# Altium PCB PCB1.PcbDoc
Units mil, origin at the board's own origin, x right, y up, seen from the top; angles counter-clockwise.
Board outline 3120.71 x 2355.23 mil, 2 copper layers (Top Layer, Bottom Layer); 81 components, 83 nets, 277 pads, 87 vias.
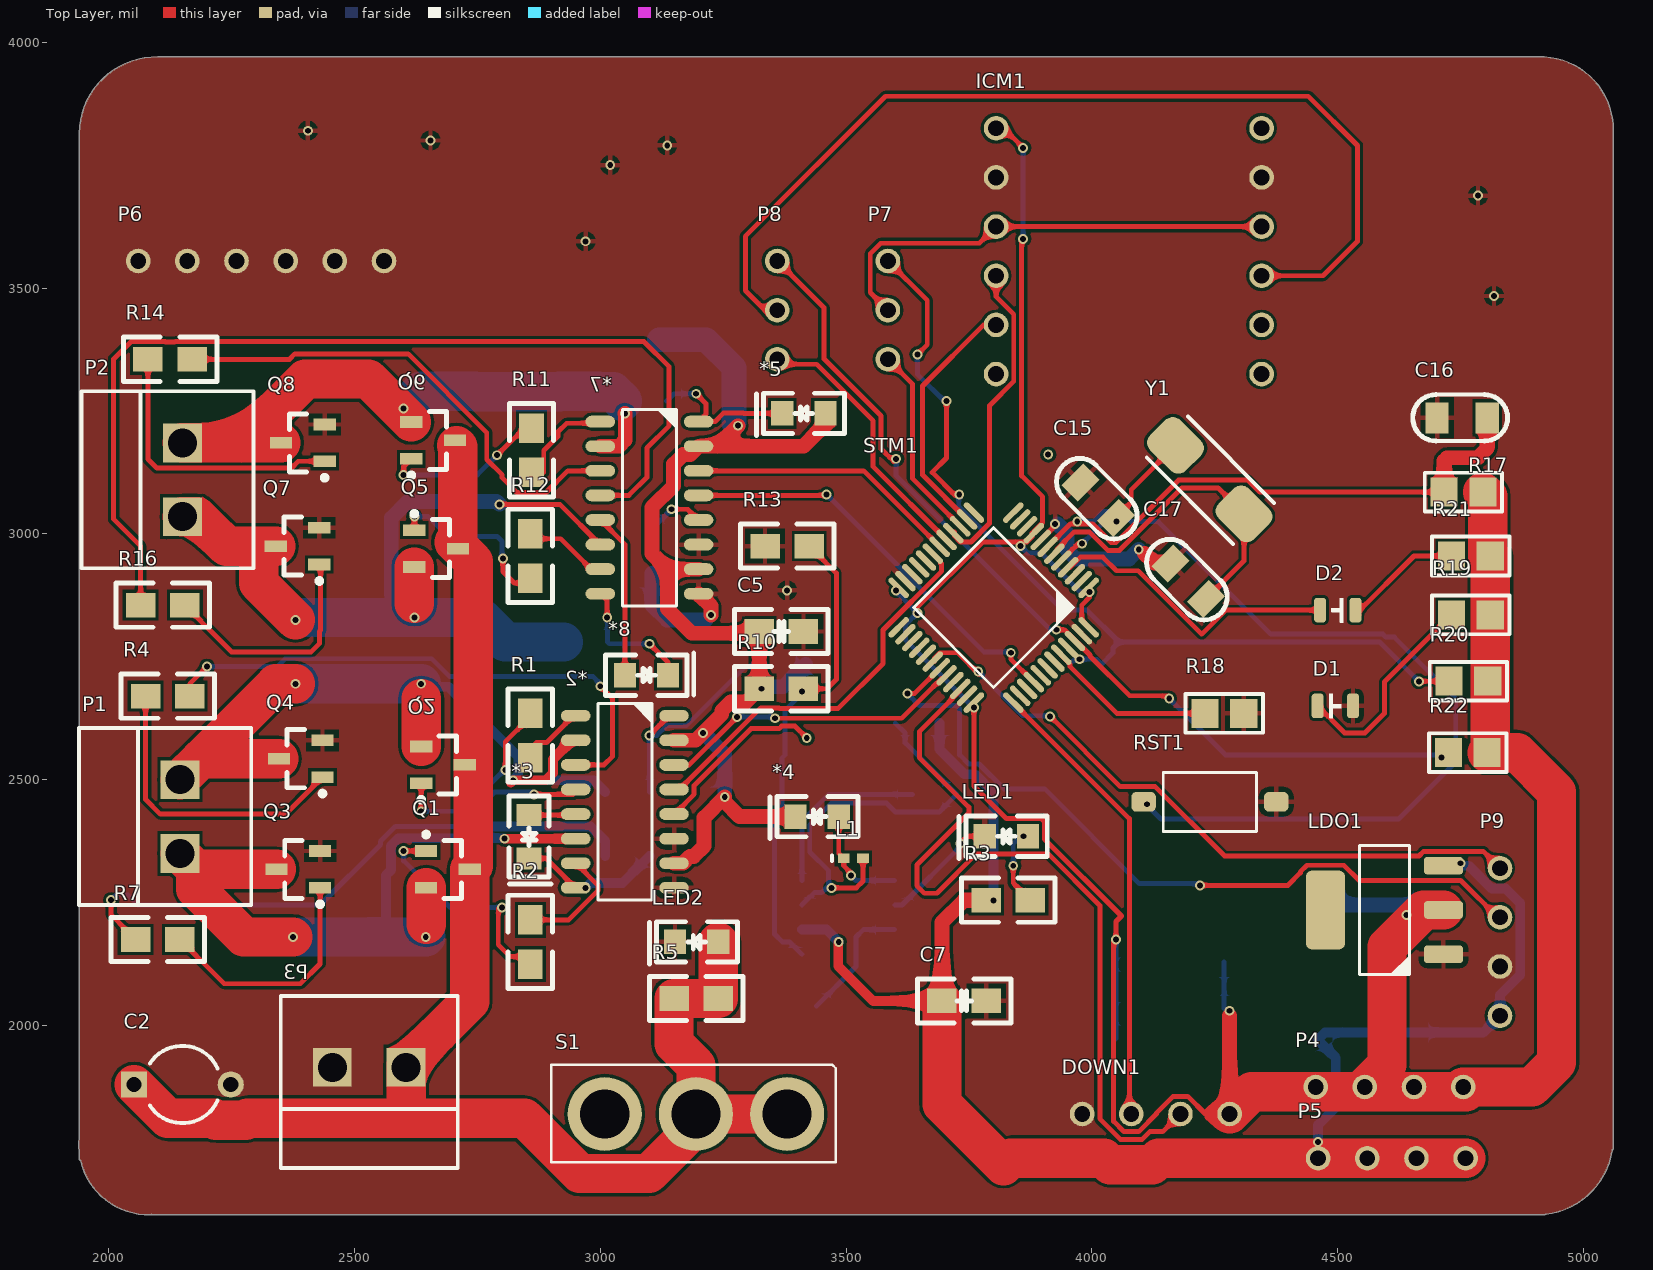
[diagram p0: Top Layer view]
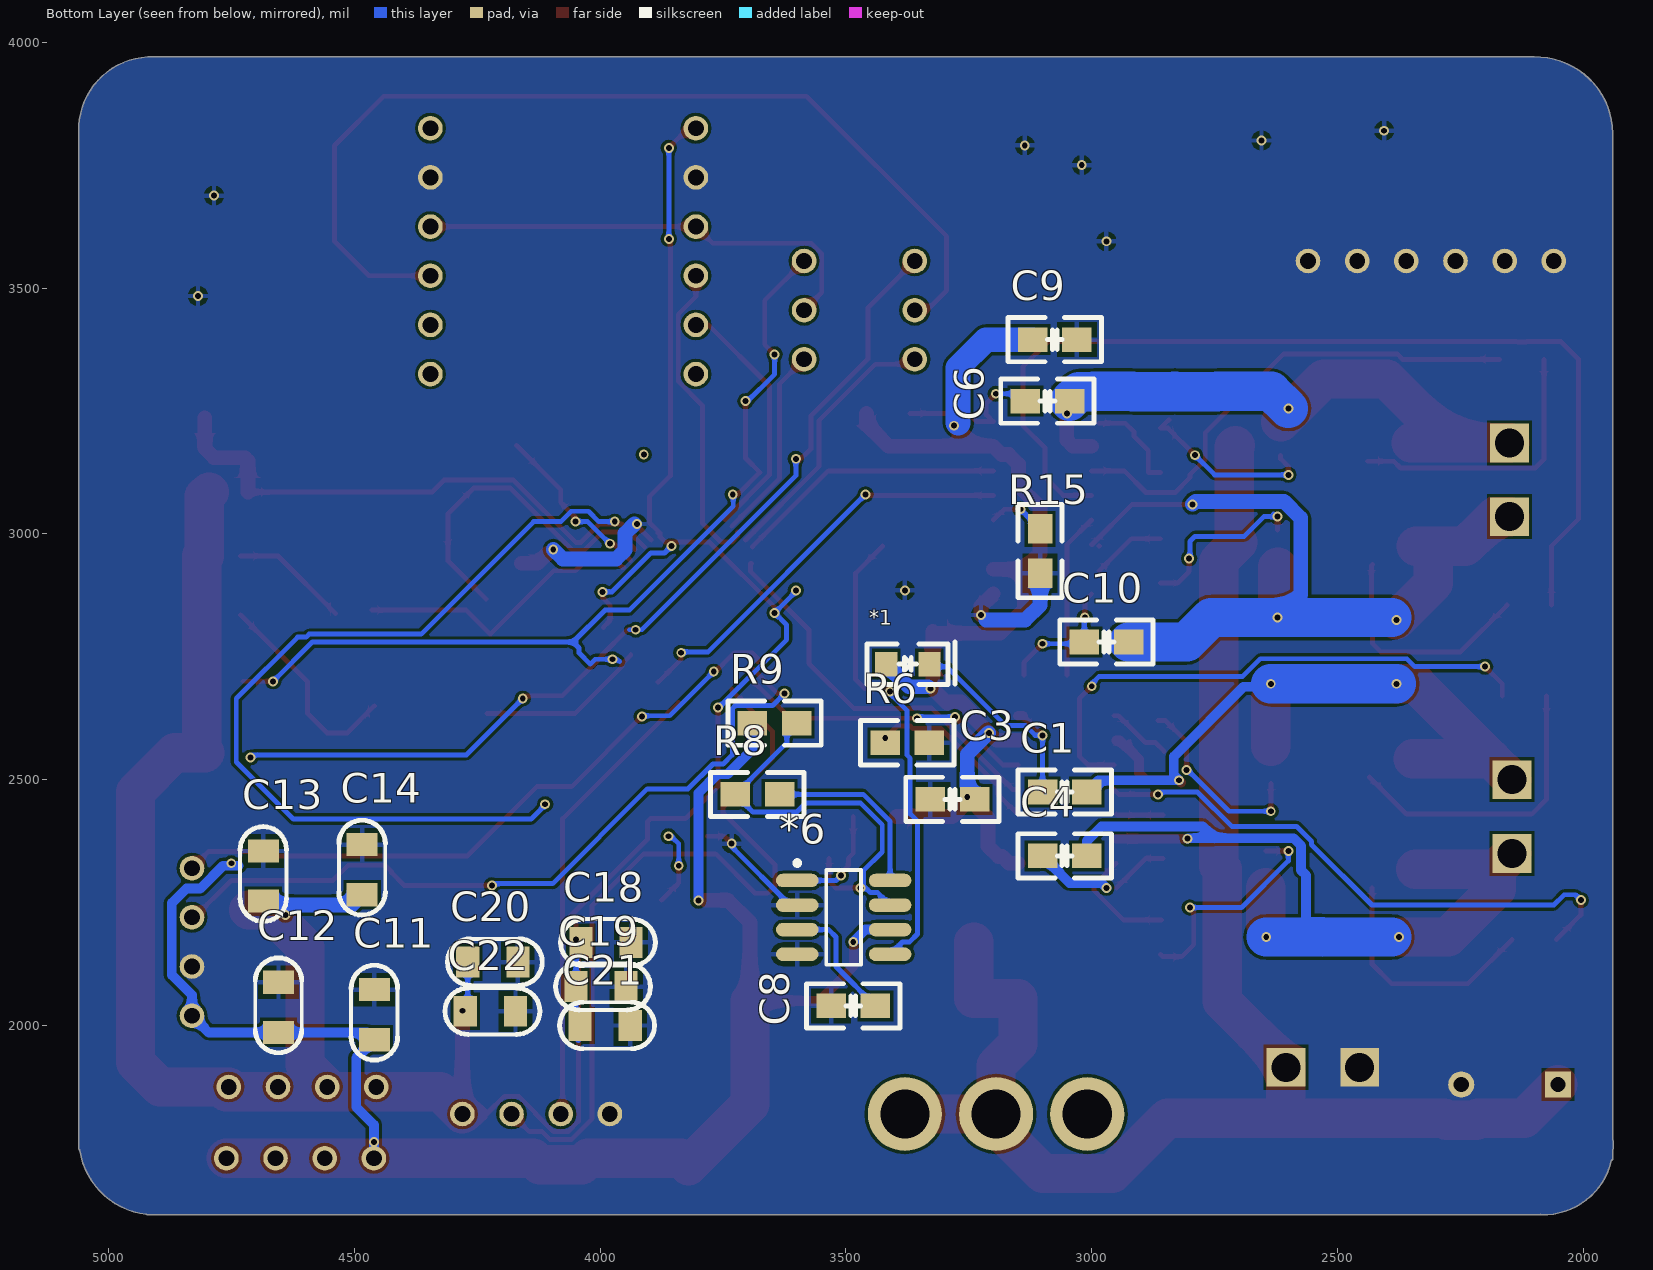
[diagram p1: Bottom Layer view, seen from below]

## Layer stack, top to bottom
Top Solder: solder mask 0.4, Solder Resist, Dk 3.5
Top Layer: signal copper 1.4
Dielectric 1: dielectric 12.6, FR-4, Dk 4.8
Bottom Layer: signal copper 1.4
Bottom Solder: solder mask 0.4, Solder Resist, Dk 3.5

## Board outline
1942.99,1725.4 ccw(c2081.67,1757.22) 2085.12,1614.99 ccw(c2085,1620) 2087.5,1615.65 ccw(c2090,1620) 2090,1614.98 4920,1614.98 ccw(c4920,1620) 4922.95,1615.94 ccw(c4905,1770) 5058.26,1746.19 ccw(c5055,1750) 5060.02,1750 5060.02,1764.92 ccw(c4905,1770) 5060.1,1770 ccw(c4905,1770) 5060.02,1775.08 5060.02,3830 ccw(c5055,3830) 5060.01,3830.26 ccw(c4912.5,3822.5) 4920.26,3970.01 ccw(c4912.5,3822.5) 4904.87,3970.01 2100.04,3970.01 cw(c2097.5,3812.5) 2100.08,3970.01 2100.04,3970.01 ccw(c2097.5,3812.5) 1939.99,3815.08 ccw(c1945,3815) 1940.65,3812.5 ccw(c1945,3810) 1939.98,3810 1939.99,1770.23 ccw(c2081.67,1757.22) 1939.99,1744.21 1939.99,1730 ccw(c1945,1730)

## Design rules (kind name [scope] priority, off if disabled: settings)
Clearance Clearance_5 [InNamedPolygon('Top Layer-No Net1')] p1: gap=6 ignorepadtopadclearanceinfootprint=FALSE except(0: Arc-Hole Track-Hole SMDPad-Hole THPad-Hole Via-Hole Fill-Hole Poly-Hole Region-Hole Text-Hole)
Clearance Clearance_4 [InNamedPolygon('Top Layer-No Net')] p2: gap=6 ignorepadtopadclearanceinfootprint=FALSE except(0: Arc-Hole Track-Hole SMDPad-Hole THPad-Hole Via-Hole Fill-Hole Poly-Hole Region-Hole Text-Hole)
Clearance Clearance_3 [InNamedPolygon('Top Layer-No Net')] p3: gap=6 ignorepadtopadclearanceinfootprint=FALSE except(0: Arc-Hole Track-Hole SMDPad-Hole THPad-Hole Via-Hole Fill-Hole Poly-Hole Region-Hole Text-Hole)
Clearance Clearance_2 [InNamedPolygon('Top Layer-No Net1')] p4: gap=6 ignorepadtopadclearanceinfootprint=FALSE except(0: Arc-Hole Track-Hole SMDPad-Hole THPad-Hole Via-Hole Fill-Hole Poly-Hole Region-Hole Text-Hole)
Clearance Clearance_1 [InNamedPolygon('Drill Drawing-No Net')] p5: gap=6 ignorepadtopadclearanceinfootprint=FALSE except(0: Arc-Hole Track-Hole SMDPad-Hole THPad-Hole Via-Hole Fill-Hole Poly-Hole Region-Hole Text-Hole)
Clearance [All] p6: gap=6 ignorepadtopadclearanceinfootprint=FALSE except(0: Arc-Hole Track-Hole SMDPad-Hole THPad-Hole Via-Hole Fill-Hole Poly-Hole Region-Hole Text-Hole)
PlaneClearance [All] p1: clearance=10
PlaneConnect [All] p1: planeconnectstyle=Direct reliefexpansion=20 reliefentries=4 reliefconductorwidth=10 reliefairgap=10
PolygonConnect PolygonConnect_7 [All vs IsNamedPolygon('Top Layer-No Net')] p1: thpad.connectstyle=Direct thpad.reliefconductorwidth=10 thpad.reliefentries=4 thpad.polygonreliefangle="90 Angle" thpad.airgapwidth=10 smdpad.connectstyle=Relief smdpad.reliefconductorwidth=10 smdpad.reliefentries=4 smdpad.polygonreliefangle="90 Angle" smdpad.airgapwidth=10 via.connectstyle=Relief via.reliefconductorwidth=10 via.reliefentries=4 via.polygonreliefangle="90 Angle" via.airgapwidth=10
PolygonConnect PolygonConnect_6 [All vs IsNamedPolygon('Top Layer-No Net1')] p2: thpad.connectstyle=Direct thpad.reliefconductorwidth=10 thpad.reliefentries=4 thpad.polygonreliefangle="90 Angle" thpad.airgapwidth=10 smdpad.connectstyle=Relief smdpad.reliefconductorwidth=10 smdpad.reliefentries=4 smdpad.polygonreliefangle="90 Angle" smdpad.airgapwidth=10 via.connectstyle=Relief via.reliefconductorwidth=10 via.reliefentries=4 via.polygonreliefangle="90 Angle" via.airgapwidth=10
PolygonConnect PolygonConnect_5 [All vs IsNamedPolygon('Top Layer-No Net1')] p3: thpad.connectstyle=Direct thpad.reliefconductorwidth=10 thpad.reliefentries=4 thpad.polygonreliefangle="90 Angle" thpad.airgapwidth=10 smdpad.connectstyle=Relief smdpad.reliefconductorwidth=10 smdpad.reliefentries=4 smdpad.polygonreliefangle="90 Angle" smdpad.airgapwidth=10 via.connectstyle=Relief via.reliefconductorwidth=10 via.reliefentries=4 via.polygonreliefangle="90 Angle" via.airgapwidth=10
PolygonConnect PolygonConnect_4 [All vs IsNamedPolygon('Top Layer-No Net')] p4: thpad.connectstyle=Direct thpad.reliefconductorwidth=10 thpad.reliefentries=4 thpad.polygonreliefangle="90 Angle" thpad.airgapwidth=10 smdpad.connectstyle=Relief smdpad.reliefconductorwidth=10 smdpad.reliefentries=4 smdpad.polygonreliefangle="90 Angle" smdpad.airgapwidth=10 via.connectstyle=Relief via.reliefconductorwidth=10 via.reliefentries=4 via.polygonreliefangle="90 Angle" via.airgapwidth=10
PolygonConnect PolygonConnect_3 [All vs IsNamedPolygon('Top Layer-No Net1')] p5: thpad.connectstyle=Direct thpad.reliefconductorwidth=10 thpad.reliefentries=4 thpad.polygonreliefangle="90 Angle" thpad.airgapwidth=10 smdpad.connectstyle=Relief smdpad.reliefconductorwidth=10 smdpad.reliefentries=4 smdpad.polygonreliefangle="90 Angle" smdpad.airgapwidth=10 via.connectstyle=Relief via.reliefconductorwidth=10 via.reliefentries=4 via.polygonreliefangle="90 Angle" via.airgapwidth=10
PolygonConnect PolygonConnect_2 [All vs IsNamedPolygon('Top Layer-No Net')] p6: thpad.connectstyle=Direct thpad.reliefconductorwidth=10 thpad.reliefentries=4 thpad.polygonreliefangle="90 Angle" thpad.airgapwidth=10 smdpad.connectstyle=Relief smdpad.reliefconductorwidth=10 smdpad.reliefentries=4 smdpad.polygonreliefangle="90 Angle" smdpad.airgapwidth=10 via.connectstyle=Relief via.reliefconductorwidth=10 via.reliefentries=4 via.polygonreliefangle="90 Angle" via.airgapwidth=10
PolygonConnect PolygonConnect_1 [All vs IsNamedPolygon('Drill Drawing-No Net')] p7: thpad.connectstyle=Direct thpad.reliefconductorwidth=10 thpad.reliefentries=4 thpad.polygonreliefangle="90 Angle" thpad.airgapwidth=10 smdpad.connectstyle=NoConnect smdpad.reliefconductorwidth=10 smdpad.reliefentries=4 smdpad.polygonreliefangle="90 Angle" smdpad.airgapwidth=10 via.connectstyle=Relief via.reliefconductorwidth=10 via.reliefentries=4 via.polygonreliefangle="90 Angle" via.airgapwidth=10
PolygonConnect [All] p8: connectstyle=Direct reliefconductorwidth=10 reliefentries=4 polygonreliefangle="90 Angle" airgapwidth=10
RoutingVias [All] p1: holewidth=28 width=50 viastyle="Through Hole" minholewidth=28 minwidth=50 maxholewidth=28 maxwidth=50
SolderMaskExpansion [All] p1: expansion=4
Width [All] p1: maxlimit=100 minlimit=10 preferedwidth=10 minimp=50.000000 maximp=50.000000 favimp=50.000000
28 further rules are at their usual default settings.

## Components (designator, comment, footprint, x,y, rotation, side; value= is the part's Value field where it differs from the comment)
*1 "IN5819" 0805D 3418,2735 r180 bottom
*2 "HIP4082" SOP_E150_16 3050,2455 r180 top
*3 "IN5819" 0805D 2855,2428 r270 top
*4 "IN5819" 0805D 3485,2425 r180 top
*5 "IN5819" 0805D 3458,3245 r180 top
*6 "MC34063" SOIC8 3504.49,2220 r180 bottom
*7 "HIP4082" SOP_E150_16 3100,3053.23 r180 top
*8 "IN5819" 0805D 3050,2712.45 r0 top
C1 "Cap" 0805C 3010,2475 r0 bottom value=1uF
C2 "Cap2" CAPR5-4X5 2150,1880 r0 top value=100pF
C3 "Cap" 0805C 3328.2,2460 r180 bottom value=0.1uF
C4 "Cap" 0805C 3010,2345 r0 bottom value=0.1uF
C5 "Cap" 0805C 3413.23,2801.46 r180 top value=0.1uF
C6 "Cap" 0805C 3045,3270 r0 bottom value=0.1uF
C7 "Cap" 0805C 3785,2050 r180 top value=0.1uF
C8 "Cap" 0805C 3440,2040 r0 bottom value=0.1uF
C9 "Cap" 0805C 3030,3395 r0 bottom value=0.1uF
C10 "Cap" 0805C 2925,2780 r0 bottom value=0.1uF
C11 "CAP_0805" CAP_0805 4460,2025 r270 bottom value=10u
C12 "CAP_0805" CAP_0805 4655,2040 r270 bottom value=0.1u
C13 "CAP_0805" CAP_0805 4686,2307 r270 bottom value=10u
C14 "CAP_0805" CAP_0805 4485,2320 r270 bottom value=0.1u
C15 "Cap" CAP_0805 4010,3070 r315 top value=20PF
C16 "CAP_0805" CAP_0805 4750,3235 r0 top value=0.1u
C17 "Cap" CAP_0805 4193.23,2905.35 r315 top value=20PF
C18 "CAP_0805" CAP_0805 3985,2170 r0 bottom value=0.1u
C19 "CAP_0805" CAP_0805 3995,2080 r0 bottom value=0.1u
C20 "CAP_0805" CAP_0805 4215,2130 r0 bottom value=0.1u
C21 "CAP_0805" CAP_0805 3986.72,2001 r0 bottom value=0.1u
C22 "CAP_0805" CAP_0805 4220,2030 r0 bottom value=0.1u
D1 "LED_0805" LED_0805_RED 4495,2650 r0 top
D2 "LED_0805" LED_0805_RED 4500,2845 r180 top
DOWN1 "HDR1x4_2.54" HDR1x4_2.54_180 4280,1820 r270 top
ICM1 "ICM20600" ICM20600模块 4122.21,3624.15 r0 top
L1 "Inductor" 0402-A 3514.68,2340 r0 top value=10mH
LDO1 "LDO1117" SOT223-3 4595,2235 r90 top
LED1 "lED" 0805D 3870,2385 r180 top
LED2 "lED" 0805D 3240,2170 r180 top
P1 "Header 2" Green_2P#1 2240,2425 r270 top
P2 "Header 2" Green_2P#1 2245,3110 r270 top
P3 "Header 2" Green_2P#2 2530,2010 r180 top
P4 "HDR1x4_2.54" HDR1x4_2.54_180 4455,1875 r90 top
P5 "HDR1x4_2.54" HDR1x4_2.54_180 4460,1730 r90 top
P6 "HDR1x6_2.54" HDR1X6_2.54_180 2060,3555 r90 top
P7 "HDR1x3_2.54" HDR1X3_2.54_180 3585,3355 r180 top
P8 "HDR1x3_2.54" HDR1X3_2.54_180 3360,3355 r180 top
P9 "HDR1x4_2.54" HDR1x4_2.54_180 4830,2020 r180 top
Q1 "MOSFET N" NMOS_SOT23#1 2690,2317.6 r0 top
Q2 "MOSFET N" NMOS_SOT23#2 2680,2530 r0 top
Q3 "MOSFET N" NMOS_SOT23#1 2385.71,2317.6 r180 top
Q4 "MOSFET N" NMOS_SOT23#1 2390.71,2542.6 r180 top
Q5 "MOSFET N" NMOS_SOT23#1 2666.06,2970 r0 top
Q6 "MOSFET N" NMOS_SOT23#2 2660,3190 r0 top
Q7 "MOSFET N" NMOS_SOT23#1 2384.29,2975 r180 top
Q8 "MOSFET N" NMOS_SOT23#1 2395,3185 r180 top
R1 "Res1" 0805R 2857.6,2544.75 r90 top value=10
R2 "Res1" 0805R 2857.6,2125 r90 top value=1K
R3 "Res1" 0805R 3875,2255 r180 top value=1K
R4 "Res1" 0805R 2165,2670 r180 top value=1K
R5 "Res1" 0805R 3150,2055 r0 top value=1K
R6 "Res1" 0805R 3330,2575 r0 bottom value=10K
R7 "Res1" 0805R 2145,2175 r180 top value=1K
R8 "Res1" 0805R 3635,2470 r0 bottom value=1K
R9 "Res1" 0805R 3600,2615 r0 bottom value=1K
R10 "Res1" 0805R 3413.23,2685 r180 top value=1K
R11 "Res1" 0805R 2860,3125 r90 top value=1K
R12 "Res1" 0805R 2857.6,2910 r90 top value=1K
R13 "Res1" 0805R 3335,2975.21 r0 top value=1K
R14 "Res1" 0805R 2170,3355 r180 top value=1K
R15 "Res1" 0805R 3105,2920 r90 bottom value=1K
R16 "Res1" 0805R 2155,2855 r180 top value=1K
R17 "RES_0805" RES_0805 4756.34,3085.25 r0 top value=10K
R18 "RES_0805" RES_0805 4270,2635 r0 top value=10K
R19 "RES_0805" RES_0805 4770,2835 r180 top value=1K
R20 "RES_0805" RES_0805 4765,2700 r180 top value=4.7K
R21 "RES_0805" RES_0805 4770,2954.75 r180 top value=1K
R22 "RES_0805" RES_0805 4763.66,2554.75 r180 top value=4.7K
RST1 "ButtonTACT_3x6x2.5_180" ButtonTACT_3x6x2.5_180 4240,2455 r180 top
S1 "00-1SW-2" 单向大开关 3483,1962 r180 top
STM1 "STM32F103C" LQFP_P0.5_48 3800,2850 r225 top
Y1 "8M" Osc-6032 4239.6,3110.4 r315 top

## Footprints (in the part's own frame and the unit in brackets; to place one, negate y for a bottom-side part, rotate by r counter-clockwise, add the part's x,y. Pads: shape width x height; smd on the part's side, far side on the other; paste and mask are expansions set on the pad)
0402-A [mm] "Chip Inductor, Body 1.0x0.5mm, IPC High Density"
  rect 0.6x0.5 smd: 1(-0.5,0) 2(0.5,0)
  silkscreen extent -1.1,-0.15 -1.1,0.15, body extent -0.55,-0.3 0.55,0.3, height 0.55
0805C [mil]
  rect 60x50 smd: 1(0,0) 2(90,0)
  silkscreen extent -50,-45 140,45
0805D [mil]
  rect 45x50 smd: A(0,0) K(88,0)
  silkscreen extent -39,-41 140,45
0805R [mil]
  rect 60x50 smd: 1(0,0) 2(90,0)
  silkscreen extent -50,-45 140,45
ButtonTACT_3x6x2.5_180 [mil]
  rrect50% 50x40 smd: 1(-135,0) 2(135,0)
  silkscreen extent -95,-60 95,60, body extent -157,-71 157,71, height 94
CAP_0805 [mil]
  rect 47.24x62.99 smd: 1(-48,1) 2(54,1)
  silkscreen extent -98,-46 95,48, body extent -42,-25 36,24, height 39
CAPR5-4X5 [mm] "Capacitor; 2 Leads"
  rect 1.35x1.35 hole 0.8: 1(-2.5,0)
  round 1.35 hole 0.8: 2(2.5,0)
  silkscreen extent -1.69,-2 1.82,2
Green_2P#1 [mm]
  rect 2x2 hole 1.5: 1(-1.905,-2.413) 2(1.905,-2.413)
  silkscreen extent -4.57,-7.62 4.57,1.27
Green_2P#2 [mm]
  rect 2x2 hole 1.5: 1(-1.905,2.413) 2(1.905,2.413)
  silkscreen extent -4.57,-1.27 4.57,7.62
HDR1X3_2.54_180 [mil]
  round 50 hole 32: 1(0,0) 2(0,-100) 3(0,-200)
  body extent -49,-250 49,50, height 323
HDR1x4_2.54_180 [mil]
  round 50 hole 32: 1(0,0) 2(0,-100) 3(0,-200) 4(0,-300)
  body extent -49,-350 49,50, height 323
HDR1X6_2.54_180 [mil]
  round 50 hole 32: 1(0,0) 2(0,-100) 3(0,-200) 4(0,-300) 5(0,-400) 6(0,-500)
  body extent -49,-550 49,50, height 323
ICM20600模块 [mil]
  round 50 hole 32: 1(222.79,200.85) 2(222.79,100.85) 3(222.79,0.85) 4(222.79,-99.15) 5(222.79,-199.15) 6(222.79,-299.15) 7(-317.21,200.85) 8(-317.21,100.85) 9(-317.21,0.85) 10(-317.21,-99.15) 11(-317.21,-199.15) 12(-317.21,-299.15)
  body extent -366,-349 272,251, height 323
LED_0805_RED [mil]
  rrect50% 24x50 smd: 1(-36,0) 2(36,0)
  silkscreen extent -12,-24 12,24, body extent -40,-25 40,25, height 43
LQFP_P0.5_48 [mil]
  oval 54x12 smd: 1(-165,108.27) 2(-165,88.58) 3(-165,68.9) 4(-165,49.21) 5(-165,29.53) 6(-165,9.84) 7(-165,-9.84) 8(-165,-29.53) 9(-165,-49.21) 10(-165,-68.9) 11(-165,-88.58) 12(-165,-108.27) 25(165,-108.27) 26(165,-88.58) 27(165,-68.9) 28(165,-49.21) 29(165,-29.53) 30(165,-9.84) 31(165,9.84) 32(165,29.53) 33(165,49.21) 34(165,68.9) 35(165,88.58) 36(165,108.27)
  oval 12x54 smd: 13(-108.27,-165) 14(-88.58,-165) 15(-68.9,-165) 16(-49.21,-165) 17(-29.53,-165) 18(-9.84,-165) 19(9.84,-165) 20(29.53,-165) 21(49.21,-165) 22(68.9,-165) 23(88.58,-165) 24(108.27,-165) 37(108.27,165) 38(88.58,165) 39(68.9,165) 40(49.21,165) 41(29.53,165) 42(9.84,165) 43(-9.84,165) 44(-29.53,165) 45(-49.21,165) 46(-68.9,165) 47(-88.58,165) 48(-108.27,165)
  silkscreen extent -115,-115 115,115, body extent -177,-178 177,177, height 61
NMOS_SOT23#1 [mm]
  rect 1.15x0.6 smd: D(1.125,0) G(-1.125,0.95) S(-1.125,-0.95)
  silkscreen extent -1.25,-1.5 0.7,1.92, body extent -0.7,-1.5 0.7,1.5, height 1.14
NMOS_SOT23#2 [mm]
  rect 1.15x0.6 smd: D(1.125,0) G(-1.125,-0.95) S(-1.125,0.95)
  silkscreen extent -1.25,-1.92 0.7,1.5, body extent -0.7,-1.5 0.7,1.5, height 1.14
Osc-6032 [mm]
  rrect50% 2.6x2.2 smd: 1(2.5,0) 2(-2.5,0)
  silkscreen extent -3.1,-1.5 3.2,1.5
RES_0805 [mm]
  rect 1.4x1.5 smd: 1(-1.018,-0.006) 2(0.982,-0.006)
  silkscreen extent -2.02,-1.01 1.98,0.99, body extent -1.1,-0.64 0.9,0.62, height 0.6
SOIC8 [mm]
  oval 2.2x0.7 smd: 1(-2.4,1.905) 2(-2.4,0.635) 3(-2.4,-0.635) 4(-2.4,-1.905) 5(2.4,-1.905) 6(2.4,-0.635) 7(2.4,0.635) 8(2.4,1.905)
  silkscreen extent -2.53,-2.45 0.9,2.93
SOP_E150_16 [mil]
  oval 60x24 smd: 1(-100,-175) 2(-100,-125) 3(-100,-75) 4(-100,-25) 5(-100,25) 6(-100,75) 7(-100,125) 8(-100,175) 9(100,175) 10(100,125) 11(100,75) 12(100,25) 13(100,-25) 14(100,-75) 15(100,-125) 16(100,-175)
  silkscreen extent -55,-200 55,200, body extent -118,-197 118,197, height 69
SOT223-3 [mil]
  rrect40% 36x80 smd: 1(-90.16,-120) 2(0,-120) 3(90.16,-120)
  rrect30% 160x80 smd: 4(0,120)
  silkscreen extent -131,-51 131,51, body extent -132,-144 132,144, height 71
单向大开关 [mil]
  oval 150.85x150 hole 100: COM(288.5,142) L(103,142) R(474,142)
  silkscreen extent 4,42 583,240

## Part data
C1 C2 C3 C4 C5 C6 C7 C8 C9 C10: "Capacitor", Publisher="Altium Limited"
  C1 C3 C4 C5 C6 C7 C8 C9 C10: LatestRevisionDate=17-Jul-2002, LatestRevisionNote="Re-released for DXP Platform.", PackageReference=RAD-0.3, Published=8-Jun-2000
  C2: PackageDescription="Capacitor; 2 Leads", PackageReference=CAPR5-4X5, Published=23-Sep-2002
C11 C12 C13 C14 C16 C18 C19 C20 C21 C22: library part Cap_0603, "Capacitor"
C15 C17: library part Cap_1, "Capacitor", LatestRevisionDate=17-Jul-2002, LatestRevisionNote="Re-released for DXP Platform.", PackageReference=RAD-0.3, Published=8-Jun-2000, Publisher="Altium Limited"
D1 D2: "LED"
DOWN1 P4 P5 P6 P7 P8 P9: "Header"
LDO1: "Power"
LED1 LED2: library part 00-D-LED, "LED"
P1 P2 P3: "Header, 2-Pin", LatestRevisionDate=17-Jul-2002, LatestRevisionNote="Re-released for DXP Platform.", Publisher="Altium Limited"
R1 R2 R3 R4 R5 R6 R7 R8 R9 R10 R11 R12 R13 R14 R15 R16 R17 R18 R19 R20 R21 R22: "Resistor"
  R1 R2 R3 R4 R5 R6 R7 R8 R9 R10 R11 R12 R13 R14 R15 R16: LatestRevisionDate=17-Jul-2002, LatestRevisionNote="Re-released for DXP Platform.", PackageReference=AXIAL-0.3, Published=8-Jun-2000, Publisher="Altium Limited"
RST1: "Button"
S1: library part 00-1SW-2_1
STM1: "MCU"
Y1: library part C-Osc, "Crystal Oscillator", LatestRevisionDate=17-Jul-2002, LatestRevisionNote="Re-released for DXP Platform.", PackageDescription="Crystal, Thru-Hole; 2 Leads; Body 3.1 x 8.2 mm (Dia.xH)", PackageReference=R38, Published=8-Jun-2000, Publisher="Altium Limited"
L1: Code_IEC=1005, Code_JEITA=0402, LatestRevisionDate=29-May-2009, LatestRevisionNote="IPC-7351 Footprint Added.", PackageDescription="Chip Inductor", PackageReference=0402-A, Published=8-Jun-2000, Publisher="Altium Limited"

## Via types
v1: diameter 20, hole 12, Top Layer to Bottom Layer, 85 vias
v2: diameter 20/20 (per signal layer), hole 12, Top Layer to Bottom Layer, 2 vias

## Nets (pads, with @x,y where several pads share a name; then routed paths per layer and width w, separated by ;. In a path a pad name is that pad's centre, name@x,y a point inside that pad or via, vN(x,y) a via of type N, cw(c..) or ccw(c..) an arc to the next point about the centre after c; other vN are vias at no path point)
3V3: C13.2 C14.2 C18.2 C19.2 C20.2 C21.2 C22.2 DOWN1.1 ICM1.7 LDO1.2 P4.1 P4.2 P4.3 P4.4 R17.2 R19.1 R20.1 R21.1 R22.1 STM1.1 STM1.9 STM1.24 STM1.36 STM1.48 | length 6206.7
  Top Layer w10: 3644,2850 3777.54,2983.54 3867.74,2983.54 3878.08,2993.88 3878.08,3001.47 STM1.9 3881.87,3005.27 3899.8,3023.2 3899.8,3075.2 3857,3118 v1@3857,3602.04 ; v1(3760,2646.8) 3760,2486.63 3825.63,2421 3897.06,2421 3903.5,2414.56 3903.5,2379.13 4060,2222.63 4048.89,2211.52 v1(4048.89,2175) 4044,2170.11 4044,1805.09 4065.09,1784 4094.91,1784 4130.91,1820 4130.91,1821.82 4165.09,1856 4194.91,1856 4230.91,1820 DOWN1.1 ; ICM1.7 3820,3825 v1(3860,3785) ; STM1.48 3979.31,2823.8 3979.31,2855 3995,2870.69 v1(3995,2882)
  Top Layer w30: DOWN1.1 4280,2020
  Top Layer w80: DOWN1.1 4325,1865 P4.4@4760,1865 ; P4.2 4600,1920 4600,2160 4675,2235 LDO1.2 ; P4.4 4895,1875 4945,1925 4945,2475 4865,2555 R22.1 4810.08,2561.34 R19.1 R21.1 ; R17.2 4803.74,3076.26 4804.9,3076.26 R21.1@4804.9,2955
  Bottom Layer w10: v1@3605,2885 3605,2879.21 v1(3645,2839.21) 3620.4,2814.6 3620.4,2784.6 v1@3755,2650 ; v1(3855,2975) 3869,2961 3896.63,2961 3975.63,2882 v1@3985,2882 ; v1(3860,3600) v1(3860,3785) ; C21.2@4044,1969 4048.89,1973.89 v1(4048.89,2175) ; C20.2 4269,2034 C22.2
  Bottom Layer w30: C14.2 4505,2245 4677,2245 C13.2
  other v1: 4280,2030 4640,2225 3601.63,2885
5V: *6.6 C7.2 C11.2 C12.2 LDO1.3 P5.1 P5.2 P5.3 P5.4 P9.1 R3.2 R9.2 | length 3476
  Top Layer w20: v1@3483.84,2170 3483.84,2121.16 3555,2050 C7.2
  Top Layer w30: C7.2 3695,2210 3740,2255 R3.2
  Top Layer w80: C7.2 3695,1840 3820,1715 3835,1730 4024.34,1730 4037.34,1717 4122.66,1717 4135.66,1730 P5.1 P5.2 P5.3 P5.4
  Bottom Layer w20: *6.6 3460,2195 v1(3485,2170) ; R9.2 3690,2561.8 3740.8,2511 3761.63,2511 3800,2472.63 v1@3800,2260 ; P5.1 4460,1798 4496,1834 4496,1934 C11.2 4474,1986 C12.2 4796,1986 P9.1 4830,2062.02 4871,2103.02 4871,2249 4841,2279 4813.02,2279 4767.02,2325 4735,2325
  other v1: 4460,1762.81 3800,2254 4750,2330
7.2V: C2.1 LED2.A P3.1 Q1.D Q2.D Q5.D Q6.D R5.1 R5.2 S1.COM S1.L | length 3330
  Top Layer w80: C2.1 2120.11,1811.47 2214.32,1811.47 2218.36,1807.42 2278.49,1807.42 2282.53,1811.47 2600,1811.47 ; 2702.32,2983.25 Q5.D@2710.36,2975.21 ; Q6.D@2707.6,3179.65 2710.36,3176.89 Q5.D@2710.36,2975.21 ; S1.COM@3175.21,1775.21 3099,1699 2958.46,1699 2845.99,1811.47 2600,1811.47 ; LED2.A R5.2 R5.1 3150,1963 3194.5,1918.5 S1.COM S1.L ; 2600,1811.47 2605,1816.47 P3.1 2605,1920 2734.29,2049.29 Q1.D 2741.89,2325.2 2741.89,2943.67 Q5.D@2710.36,2975.21
12v: *1.A *2.2 *2.7 *4.K *5.A *7.2 *7.7 C3.2 C5.2 C9.2 R10.2 | length 2261.6
  Top Layer w30: *2.7 3168.23,2330 3182.23,2344 3189.91,2344 3211,2365.09 3211,2423 3253,2465 3253,2455.2 3283.2,2425 *4.K ; *2.2 3193.83,2580 3247.2,2633.37 3247.2,2640.44 3265.36,2658.6 3291.04,2658.6 3293.93,2655.7 R10.2 C5.2 3319.7,2797.93 3186.07,2797.93 3136.48,2847.52 3136.48,2928.23 ; *7.7 3136.48,2928.23 ; v1(3280,3220) 3238.23,3178.23 ; *5.A 3458,3223 3413.23,3178.23 3238.23,3178.23 ; 3136.48,2928.23 3105,2959.71 3105,3053.84 3149,3097.84 3149,3141.9 3168.33,3161.23 3183,3161.23 *7.2 3238.23,3178.23
  Bottom Layer w30: v1@3210,2595 3253.2,2551.8 v1(3253.2,2465) ; v1@3332.84,2689 3372,2689 *1.A
  Bottom Layer w50: C9.2 3215,3395 3272,3338 3272,3225.98 3271.02,3225
  other v1: 3209.2,2595 3328.2,2685
ADC: STM1.13
BOOT0: R18.1 STM1.44 | length 345.6
  Top Layer w10: STM1.44 3937.55,2752.75 3955.48,2734.82 3955.48,2729.82 4050.55,2634.75 R18.1
CAN_TX: STM1.33
GND: *2.6 *2.8 *6.2 *6.4 *7.6 *7.8 C2.2 C3.1 C5.1 C7.1 C8.2 C9.1 C11.1 C12.1 C13.1 C14.1 C15.1 C16.1 C17.1 C18.1 C19.1 C20.1 C21.1 C22.1 D1.2 DOWN1.4 ICM1.2 ICM1.8 LDO1.1 LED1.K LED2.K P3.2 P6.1 P6.2 P6.3 P6.4 P6.5 P6.6 P9.2 Q3.S Q4.S Q7.S Q8.S R6.1 R13.1 R15.1 R18.2 RST1.1 STM1.8 STM1.23 STM1.35 STM1.47 | length 829
  Top Layer w10: P3.2 P3.2@2470,1915 ; v1(3732.26,2370) 3747.26,2385 LED1.K ; STM1.8 3925.14,3016.9 v1(3925.14,3020)
  Top Layer w30: *7.8 3225.14,2853.09 v1(3225.14,2835) ; 4107,2960 4127,2940 C17.1
  Bottom Layer w10: *6.2 3613.55,2245 3732.26,2363.71 v1(3732.26,2370)
  Bottom Layer w30: R15.1 3105,2855 3135,2825 3215,2825 ; v1@3930,3020 3949,3001 3949,2967.16 3967.16,2949 4075.91,2949 v1(4095.14,2968.23)
  other v1: 3380,2885 4817.71,3483.73 2970,3595 4785.14,3687.92 3020.21,3750 3136.12,3790 2654.58,3800 2405.14,3820
I2C1_SCL: P7.3 R20.2 STM1.45 | length 1870.2
  Top Layer w10: P7.3 3665,3475 3665,3385 v1(3645,3365) ; v1(3704.21,3270) 3704.21,3154.21 3675,3125 v1@3722.5,3077.5 ; v1@4666.25,2700.25 R20.2
  Bottom Layer w10: v1(3645,3365) 3645,3325 v1@3702.1,3267.9 ; v1(3730,3080.23) 3729,3079.23 3729,3056.3 3940.3,2845 3990,2845 4055,2780 ; 3960,2740 3965,2745 v1(3975,2745) 4010,2745 4020,2735 4042.81,2757.81 4042.81,2767.81 4055,2780 ; v1(4665,2700) 4585,2780 4055,2780
I2C1_SDA: P8.3 R22.2 STM1.46 | length 1887.1
  Top Layer w10: P8.3 3455,3460 3455,3356 3571,3240 3571,3173 v1@3596.51,3147.49 ; v1(3927.5,2805) 3944.7,2805 3996,2753.7 3996,2751.44 4076.75,2670.69 v1@4155,2670.69
  Bottom Layer w10: v1(3601.63,3152.6) 3601.63,3118.37 3915,2805 v1(3927.5,2805) 3940,2805 ; v1(4157.15,2665) 4271.65,2550.5 v1@4704.5,2550.5
  other v1: 4711,2545
ICM_SCK: ICM1.3 ICM1.9 P7.2 | length 948.6
  Top Layer w10: P7.2 3549,3491 3549,3569.91 3570.09,3591 3771,3591 ICM1.9 ICM1.3
ICM_SDATA: ICM1.4 P8.2 | length 2015
  Top Layer w10: P8.2 3335,3455 3295,3495 3295,3605 3580,3890 4440,3890 4540,3790 4540,3595 4470,3525 ICM1.4
KEY1: STM1.2
KEY2: STM1.3
LED: D2.2 STM1.4 | length 606.5
  Top Layer w10: STM1.4 3955.27,2931.87 3976.19,2952.79 4022.21,2952.79 4050,2925 4094.05,2925 4223.09,2795.96 4272.12,2845 D2.2
LED_PWM: STM1.42
MOTO+: *2.15 C1.1 P1.1 Q2.S Q4.D | length 1520.7
  Top Layer w20: v1@2817.77,2494 v1(2822.52,2498.75) 2889.23,2498.75 2904,2513.53 2904,2541.6 2942.4,2580 *2.15
  Top Layer w80: P1.1 2187.6,2542.6 ; Q4.D 2187.6,2542.6 ; v1(2380,2695) 2340,2695 2187.6,2542.6 ; Q2.S 2635.71,2665
  Bottom Layer w20: v1(2635.71,2695) 2641.71,2689 2691,2689 2833,2547 2833,2509.23 v1(2822.52,2498.75) 2986.25,2498.75 C1.1
  Bottom Layer w80: v1(2380,2695) v1(2635.71,2695)
MOTO-: *2.11 C4.1 P1.2 Q1.S Q3.D | length 1716.4
  Top Layer w20: v1(2805,2380) *2.11
  Top Layer w80: P1.2 P1.2@2177.4,2317.6 ; Q3.D P1.2@2177.4,2317.6 ; v1(2375,2180) 2275,2180 2177.4,2277.6 P1.2@2177.4,2317.6 ; 2645.71,2205.71 Q1.S
  Bottom Layer w20: 2530,2180 2564,2214 2564,2305.77 2574,2315.77 2574,2365.77 2589.23,2381 2750,2381 ; v1(2805,2380) 2804,2381 2750,2381 ; C4.1 3010,2375 2980,2405 2774,2405 2750,2381
  Bottom Layer w80: 2390,2180 2530,2180 v1(2645,2180)
MOTOa+: *7.15 C6.1 P2.1 Q6.S Q8.D | length 1216.7
  Top Layer w30: *7.15 3038.23,3178.23 3051,3191 3051,3244 v1(3050,3245)
  Top Layer w80: P2.1 2270,3185 ; Q8.D 2270,3185 ; Q6.S 2528.11,3315 2400,3315 2270,3185
  Bottom Layer w80: v1(2600,3255) 2635,3290 2744.45,3290 2745.45,3289 2828.55,3289 2829.55,3290 2832.45,3290 2833.45,3289 2916.55,3289 2917.55,3290 2995.8,3290 2996.8,3289 3026,3289 C6.1
MOTOa-: *7.11 C10.1 P2.2 Q5.S Q7.D | length 1729.6
  Top Layer w10: v1(2795,3060) 2917.7,3060 2999.47,2978.23 *7.11 ; *7.11@2984.47,2975 *7.11@2985,2975
  Top Layer w80: P2.2 2180,3035 2240,2975 2290,2975 ; Q7.D 2290,2975 ; v1(2380,2825) 2305,2900 2305,2960 2290,2975 ; 2621.77,2858.23 Q5.S
  Bottom Layer w30: v1(2621.77,2830) 2575,2876.77 2575,3032.07 2608.93,3066 2789,3066 v1(2795,3060)
  Bottom Layer w80: 2390,2830 v1(2621.77,2830) 2757,2830 2807,2780 C10.1
Net*1_K: *1.K *2.1 C1.2 | length 474.6
  Top Layer w10: v1(3100,2590) *2.1@3140,2630
  Top Layer w20: *2.1@3140,2630 *2.1
  Bottom Layer w10: C1.2 v1(3100,2590) 3115,2590 3135,2610 3175,2610 3295,2730 *1.K@3330,2730
  Bottom Layer w20: *1.K@3330,2730 *1.K
Net*2_5: *2.5 R6.2 | length 364.4
  Top Layer w10: *2.5 3150.53,2430 3191,2470.47 3191,2488.08 3306.92,2604 3363.7,2604 3368.7,2609 3396,2609 v1(3420,2585)
Net*2_9: *2.9 *3.K C4.2 | length 276.8
  Top Layer w10: *3.K 2889.47,2340 2949.47,2280 *2.9
  Bottom Layer w20: v1(2970,2280) 2980,2290 3045,2290 C4.2
Net*2_10: *2.10 R2.2 | length 236.5
  Top Layer w10: R2.2 2935.53,2215 2995,2274.47 2995,2285.53 2950.53,2330 *2.10
Net*2_12: *2.12 *3.A | length 95.8
  Top Layer w10: *3.A 2948,2428 *2.12
Net*2_13: *2.13 R7.2 | length 1169.2
  Top Layer w10: v1(2005,2255) 2005,2225 R7.2 ; v1(2865,2470) 2945,2470 *2.13@2955,2480
  Bottom Layer w10: v1(2005,2255) 2016,2266 2039,2266 2060,2245 2430,2245 2553,2368 2553,2374.47 2583.53,2405 2715,2405 2785,2475 2860,2475 v1(2865,2470)
Net*2_14: *2.14 R4.1 | length 1132.4
  Top Layer w10: R4.1 2165,2695 v1(2200,2730) ; *2.14@2955,2530 3007.6,2530 3025,2547.4 3025,2665 v1(3000,2690)
  Bottom Layer w10: v1(2200,2730) 2342.88,2730 2358.88,2746 2656.83,2746 2692.83,2710 2985,2710 v1@3000,2695
Net*2_16: *2.16 R1.1 | length 132.4
  Top Layer w10: R1.1@2852.6,2557.6 2870.53,2575.53 2891.12,2575.53 2945.6,2630 *2.16 *2.16@2955,2630
Net*4_A: *4.A *6.1 L1.1 | length 218.5
  Top Layer w10: *4.A 3485,2350 L1.1 3495,2325 v1@3510,2310
  Bottom Layer w10: v1(3510,2305) 3520,2295 *6.1
Net*5_K: *5.K *7.1 C6.2 | length 315.3
  Top Layer w10: v1(3195,3285) 3215,3265 3215,3243.23 *7.1 3233.23,3228.23 3251,3246 3290.77,3246 3291.77,3245 *5.K
  Bottom Layer w10: C6.2 3150,3285 v1(3195,3285)
Net*6_3: *6.3 C8.1 | length 258.3
  Bottom Layer w10: C8.1 3520,2120 3520,2180 3535,2195 *6.3
Net*6_5: *6.5 R10.1 R13.2 | length 960.6
  Top Layer w10: R10.1 3461.16,2685 3480,2703.84 3480,2920.21 R13.2
  Bottom Layer w10: *6.5 3384.78,2170.22 3370.21,2170.22 3354.2,2186.23 3354.2,2415.44 3369.2,2430.44 3369.2,2543.64 3376,2550.44 3376,2641 v1@3415,2680
  other v1: 3410,2679
Net*6_7: *6.7 L1.2 R8.2 R9.1 | length 863.2
  Top Layer w10: v1(3470,2280) 3520.69,2280 3534.37,2293.68 L1.2
  Bottom Layer w10: *6.7 3435.22,2270.22 3449.79,2270.22 3464.31,2284.74 3464.31,2314.57 3426,2352.88 3426,2408.37 3470,2452.37 3582.07,2452.37 3600.44,2434 3689,2434 R8.2 3620,2575 3620,2595 R9.1
Net*6_8: *6.8 R8.1 | length 367.8
  Bottom Layer w10: *6.8 3410,2415 3465,2470 R8.1
Net*7_5: *7.5 R15.2 | length 120.6
  Top Layer w10: v1(3145,3050) 3178.23,3050 *7.5
  Bottom Layer w10: R15.2 v1(3145,3050)
Net*7_9: *7.9 *8.K C10.2 | length 270.2
  Top Layer w10: *7.9 3014,2864.23 v1(3014,2830) ; v2(3100,2776.42) 3138,2738.42 *8.K
  Bottom Layer w10: v1@3015,2830 C10.2 3018.58,2776.42 v2(3100,2776.42)
Net*7_10: *7.10 R12.2 | length 151.9
  Top Layer w10: R12.2@2860,2990 2919.47,2990 2984.47,2925 *7.10@2985,2925
Net*7_12: *7.12 *8.A | length 336.8
  Top Layer w10: *7.12 3000.53,3028.23 3050,2978.76 *8.A
Net*7_13: *7.13 R16.2 | length 2043.8
  Top Layer w10: R16.2 2065,2975 2010,3030 2010,3355.56 2045.44,3391 2114.56,3391 2115.56,3390 2134.44,3390 2135.44,3391 3089,3391 3140,3340 3140,3220 3095,3175 3095,3115 3058.23,3078.23 *7.13
Net*7_14: *7.14 R14.1 | length 1005.2
  Top Layer w10: R14.1 2367.88,3355 2378.88,3366 2609,3366 2769,3206 2769,3151.3 2800.3,3120 2800.3,3114.14 2830.44,3084 2889.56,3084 2933.79,3128.23 *7.14
Net*7_16: *7.16 R11.1 | length 197.8
  Top Layer w10: R11.1 2885,3125 2885,3169.44 2913.56,3198 2913.56,3207.17 2931.38,3225 *7.16@2985,3225
NetC15_2: C15.2 STM1.5 Y1.2 | length 327.5
  Top Layer w10: STM1.5 v1@3971.76,2980 ; C15.2 4080,3063.63 4080,3090 Y1.2
  Bottom Layer w10: v1(3980,2980) 4025,3025 v1@4042.81,3025
  other v1: 4050,3025
NetC17_2: C17.2 STM1.6 Y1.1 | length 690.1
  Top Layer w10: STM1.6@3928.69,2968.57 3964.12,3004 3994.69,3004 4032.14,2966.55 4055.95,2966.55 4183.05,3093.65 4256.35,3093.65 Y1.1 4309.19,2944.94 C17.2
NetD1_1: D1.1 R19.2 | length 432.1
  Top Layer w10: D1.1 4514,2595 4555,2595 4595,2635 4595,2698.91 R19.2
NetD2_1: D2.1 R21.2 | length 242.3
  Top Layer w10: D2.1@4537.62,2837.62 4655,2955 R21.2
NetLED1_A: LED1.A R3.1 | length 155.7
  Top Layer w10: v1@3840,2330 v1(3840,2325) 3840,2290 R3.1
  Bottom Layer w10: v1(3840,2325) 3840,2370 v1@3855,2385
  other v1: 3860.67,2385
NetQ1_G: Q1.G R2.1 | length 467.1
  Top Layer w10: v1(2600,2355) Q1.G ; v1(2800.3,2240) 2794.8,2240 2792.4,2237.6 2792.4,2164.6 2817,2140 2855,2140 R2.1@2860,2145
  Bottom Layer w10: v1(2600,2355) 2600,2335 2695,2240 v1(2800.3,2240)
NetQ2_G: Q2.G R1.2 | length 386.8
  Top Layer w10: v1(2635.71,2435.71) Q2.G ; v2(2807,2520) 2807,2577 2850,2620 R1.2@2865,2620
  Bottom Layer w10: v1(2635.71,2435.71) 2720.71,2435.71 v2@2800,2515
NetQ3_G: Q3.G R7.1 | length 494
  Top Layer w10: R7.1 2235,2085 2389.84,2085 2430,2125.16 Q3.G
NetQ4_G: Q4.G R4.2 | length 613.6
  Top Layer w10: R4.2 2075,2460 2105,2430 2359.8,2430 Q4.G
NetQ5_G: Q5.G R12.1 | length 368.1
  Top Layer w10: Q5.G v1@2621.77,3036.77 ; v1(2802,2950) 2802,2923 2825,2900 R12.1@2860,2900
  Bottom Layer w10: v1@2630,3040 2625,3035 v1(2621.77,3035) 2650,3035 2690,2995 2790,2995 2800,2985 v1@2800,2950
NetQ6_G: Q6.G R11.2 | length 369.6
  Top Layer w10: v1(2600,3120) 2600,3136.89 Q6.G Q6.G@2615.71,3159.88 ; v1(2790,3160) 2845,3215 R11.2 R11.2@2843.11,3231.89
  Bottom Layer w10: v1(2600,3120) 2750,3120 v1(2790,3160)
NetQ7_G: Q7.G R16.1 | length 482.9
  Top Layer w10: R16.1 2250,2760 2412.17,2760 2428.58,2776.42 2428.58,2801.46 2431,2803.88 2431,2935.18 Q7.G
NetQ8_G: Q8.G R14.2 | length 575.4
  Top Layer w10: R14.2 2080,3151.89 2097.89,3134 2371.83,3134 2385.43,3147.6 Q8.G
NSS: ICM1.11 STM1.14 | length 510.1
  Top Layer w10: STM1.14 3655.27,3120 3655.27,3300.66 3779.61,3425 ICM1.11
PA0: STM1.10
PA1: STM1.11
PA2: STM1.12
PA8: STM1.29
PB2: STM1.20
PB10: STM1.21
PB11: STM1.22
PWM_INPUT: 
RELAY_PWM: STM1.43
RST: C16.2 R17.1 RST1.2 STM1.7 | length 2877.1
  Top Layer w10: STM1.7 3956.08,3020 4001.32,3020 4038.77,2982.55 4049.32,2982.55 4176.42,3109.65 4317.15,3109.65 4341.8,3085 R17.1
  Top Layer w30: R17.1 4716.26,3148.86 4722.4,3155 4785,3155 4804,3174 C16.2
  Bottom Layer w10: v1(3970,3025) 4002.37,3025 4023.37,3046 4058.7,3046 4079.7,3025 4135,3025 4364,2796 4591.63,2796 4597.63,2790 4615,2790 4740,2665 4740,2536 4624,2420 4140,2420 v1@4115,2445
  other v1: 4111.65,2450
SPI1_MISO: ICM1.10 STM1.16 | length 641.7
  Top Layer w10: STM1.16 3720.02,3003.37 3720.02,2995.78 3732.26,2983.54 3753.94,2983.54 3791.73,3021.34 3791.73,3260.82 3841,3310.09 3841,3446.57 3805,3482.57 ICM1.10
SPI1_MOSI: P8.1 STM1.17 | length 551
  Top Layer w10: P8.1 3370,3345 3440,3345 3555,3230 3555,3136.76 STM1.17
SPI1_SCK: P7.1 STM1.15 | length 400.5
  Top Layer w10: P7.1 3634.61,3305.39 3634.61,3112.83 STM1.15
SPI2_MISO: STM1.27
SPI2_MOSI: STM1.28
SPI2_NSS: STM1.25
SPI2_SCK: STM1.26
SWCLK: DOWN1.3 STM1.37 | length 924.9
  Top Layer w10: STM1.37 4076,2420.89 4076,1831 DOWN1.3@4075,1830
SWDIO: DOWN1.2 STM1.34 | length 1611.9
  Top Layer w10: STM1.34 3732.05,2680.81 3649,2597.77 3649,2544.89 3749.76,2444.13 3749.76,2432.26 3644,2326.5 3644,2284.23 3659.23,2269 3684.88,2269 3764.88,2349 3911,2349 4016,2244 4016,1810.46 4058.46,1768 4101.54,1768 4117.54,1784 4144,1784 DOWN1.2
TIM1_CH4: *2.3 STM1.32 | length 618.2
  Top Layer w10: *2.3 3180.6,2530 v1(3278.2,2627.6) ; v1(3355,2625) 3612.96,2625 STM1.32@3694.12,2706.16
  Bottom Layer w10: v1(3278.2,2627.6) v1@3355,2627.6
TIM2_CH1: STM1.38
TIM2_CH2: STM1.39
TIM3_CH1: *7.4 STM1.40 | length 849.5
  Top Layer w10: *7.4 v1@3461.16,3078.23 ; v1(3835,2758.22) 3835,2745 3881.87,2698.13 STM1.40
  Bottom Layer w10: v1(3460,3080.23) 3780.23,2760 3833.22,2760 v1(3835,2758.22)
TIM3_CH2: STM1.41
TIM3_CH3: *7.3 STM1.18 | length 554.3
  Top Layer w10: *7.3 3535.69,3128.23 STM1.18
TIM3_CH4: *2.4 STM1.19 | length 787.1
  Top Layer w10: *2.4 3160.3,2480 3326.3,2646 3363.7,2646 3364.7,2645 3483.84,2645 3574.92,2736.08 3574.92,2804.53 3694.3,2923.9 3694.3,2939.94 STM1.19@3692.34,2939.94
U1_RX: P9.3 STM1.31 | length 1562.4
  Top Layer w10: v1(3625,2675) 3638.92,2675 STM1.31 ; v1(4220,2285) 4398.68,2285 4424,2310.32 4424,2312.53 4437.47,2326 4512.53,2326 4543.53,2295 4750,2295 4825,2220 P9.3
  Bottom Layer w10: v1(3625,2675) 3649,2651 3724.56,2651 3731,2644.56 3731,2550.5 3749.5,2532 3770.33,2532 3821,2481.33 3903.67,2481.33 4096.5,2288.5 v1@4213.5,2288.5
U1_TX: P9.4 STM1.30 | length 1361.8
  Top Layer w10: STM1.30 3680.16,2740.29 3680.16,2747.88 3690.5,2758.22 3726.78,2758.22 v1@3771.12,2713.88 ; v1(3915,2628.64) 4057.64,2486 4128.7,2486 4270,2344.7 4665.2,2344.7 4674.66,2354.16 4795.84,2354.16 P9.4
  Bottom Layer w10: v1(3768.69,2719.75) 3858.45,2630 v1@3917.6,2630
pads on no net: ICM1.1 ICM1.5 ICM1.6 ICM1.12 LDO1.4 S1.R
copper on no net:
  other v1: 3911,3161.23

## Polygon pours and split planes (outlines as drawn)
GND on Top Layer "Top Layer-No Net" (solid, remove dead copper, pour order 39): 1942.99,1725.4 ccw(c2081.67,1757.22) 2085.12,1614.99 ccw(c2085,1620) 2087.5,1615.65 ccw(c2090,1620) 2090,1614.98 4920,1614.98 ccw(c4920,1620) 4922.95,1615.94 ccw(c4905,1770) 5058.26,1746.19 ccw(c5055,1750) 5060.02,1750 5060.02,1764.92 ccw(c4905,1770) 5060.1,1770 ccw(c4905,1770) 5060.02,1775.08 5060.02,3830 ccw(c5055,3830) 5060.01,3830.26 ccw(c4912.5,3822.5) 4920.26,3970.01 ccw(c4912.5,3822.5) 4904.87,3970.01 2100.04,3970.01 cw(c2097.36,3812.64) 2100.08,3970.01 2100.04,3970.01 ccw(c2097.5,3812.5) 1939.99,3815.08 ccw(c1945,3815) 1940.65,3812.5 ccw(c1945,3810) 1939.98,3810 1939.99,1770.23 ccw(c2081.67,1757.22) 1939.99,1744.21 1939.99,1730 ccw(c1945,1730)
GND on Bottom Layer "Top Layer-No Net1" (solid, remove dead copper, pour order 40): 1942.99,1725.4 ccw(c2081.67,1757.22) 2085.12,1614.99 ccw(c2085,1620) 2087.5,1615.65 ccw(c2090,1620) 2090,1614.98 4920,1614.98 ccw(c4920,1620) 4922.95,1615.94 ccw(c4905,1770) 5058.26,1746.19 ccw(c5055,1750) 5060.02,1750 5060.02,1764.92 ccw(c4905,1770) 5060.1,1770 ccw(c4905,1770) 5060.02,1775.08 5060.02,3830 ccw(c5055,3830) 5060.01,3830.26 ccw(c4912.5,3822.5) 4920.26,3970.01 ccw(c4912.5,3822.5) 4904.87,3970.01 2100.04,3970.01 cw(c2097.36,3812.64) 2100.08,3970.01 2100.04,3970.01 ccw(c2097.5,3812.5) 1939.99,3815.08 ccw(c1945,3815) 1940.65,3812.5 ccw(c1945,3810) 1939.98,3810 1939.99,1770.23 ccw(c2081.67,1757.22) 1939.99,1744.21 1939.99,1730 ccw(c1945,1730)

## Silkscreen, mask and mechanical layers (free items; w line width, h text height)
Top Solder:
  lines w80: 2130,2498.75 2148.75,2498.75 2220,2570 2320,2570 2345,2545 2275,2545 ; 2145,3180 2340,3180 ; 2160,2330 2160,2295 2265,2190 2365,2190 ; 2160,3030 2180,3030 2260,2950 2310,2950 2320,2950 ; 2160,3190 2330,3190 2320,3200 2320,3230 2400,3310 2540,3310 2610,3240 2610,3231.77 ; 2170,2350 2170,2340 2190,2320 2350,2320 ; 2200,2585 2215,2585 2330,2700 ; 2280,2930 2380,2830 2380,2825 ; 2610,1920 2610,1930 2740,2060 2740,2940 2700,2980 2700,3180 ; 2621.77,2861.77 2621.77,2950 ; 2640,2220 2640,2295 ; 2645,2570 2645,2660
Bottom Solder:
  lines w80: 2380,2180 2660,2180 ; 2380,2695 2625,2695 ; 2380,2825 2616.77,2825
Drill Drawing:
  lines w10: 1945,1730 1945,3810 ; 1945,1770 ccw(c2081.67,1757.22) 2085,1620 ; 1945,3815 cw(c2097.5,3812.5) 2100,3965 4920,3965 ; 2090,1620 4920,1620 ; 4905,3965 cw(c4912.5,3822.5) 5055,3830 5055,1750 ; 4910,1620 ccw(c4905,1770) 5055,1775